# Altium PCB Main.PcbDoc
Units mm, origin at the board's own origin, x right, y up, seen from the top; angles counter-clockwise.
Board outline 198 x 54 mm, 2 copper layers (Top Layer, Bottom Layer), stack 1.671 mm thick; 70 components, 64 nets, 254 pads, 57 vias.
Unrouted connection lines stored in the file: 37.
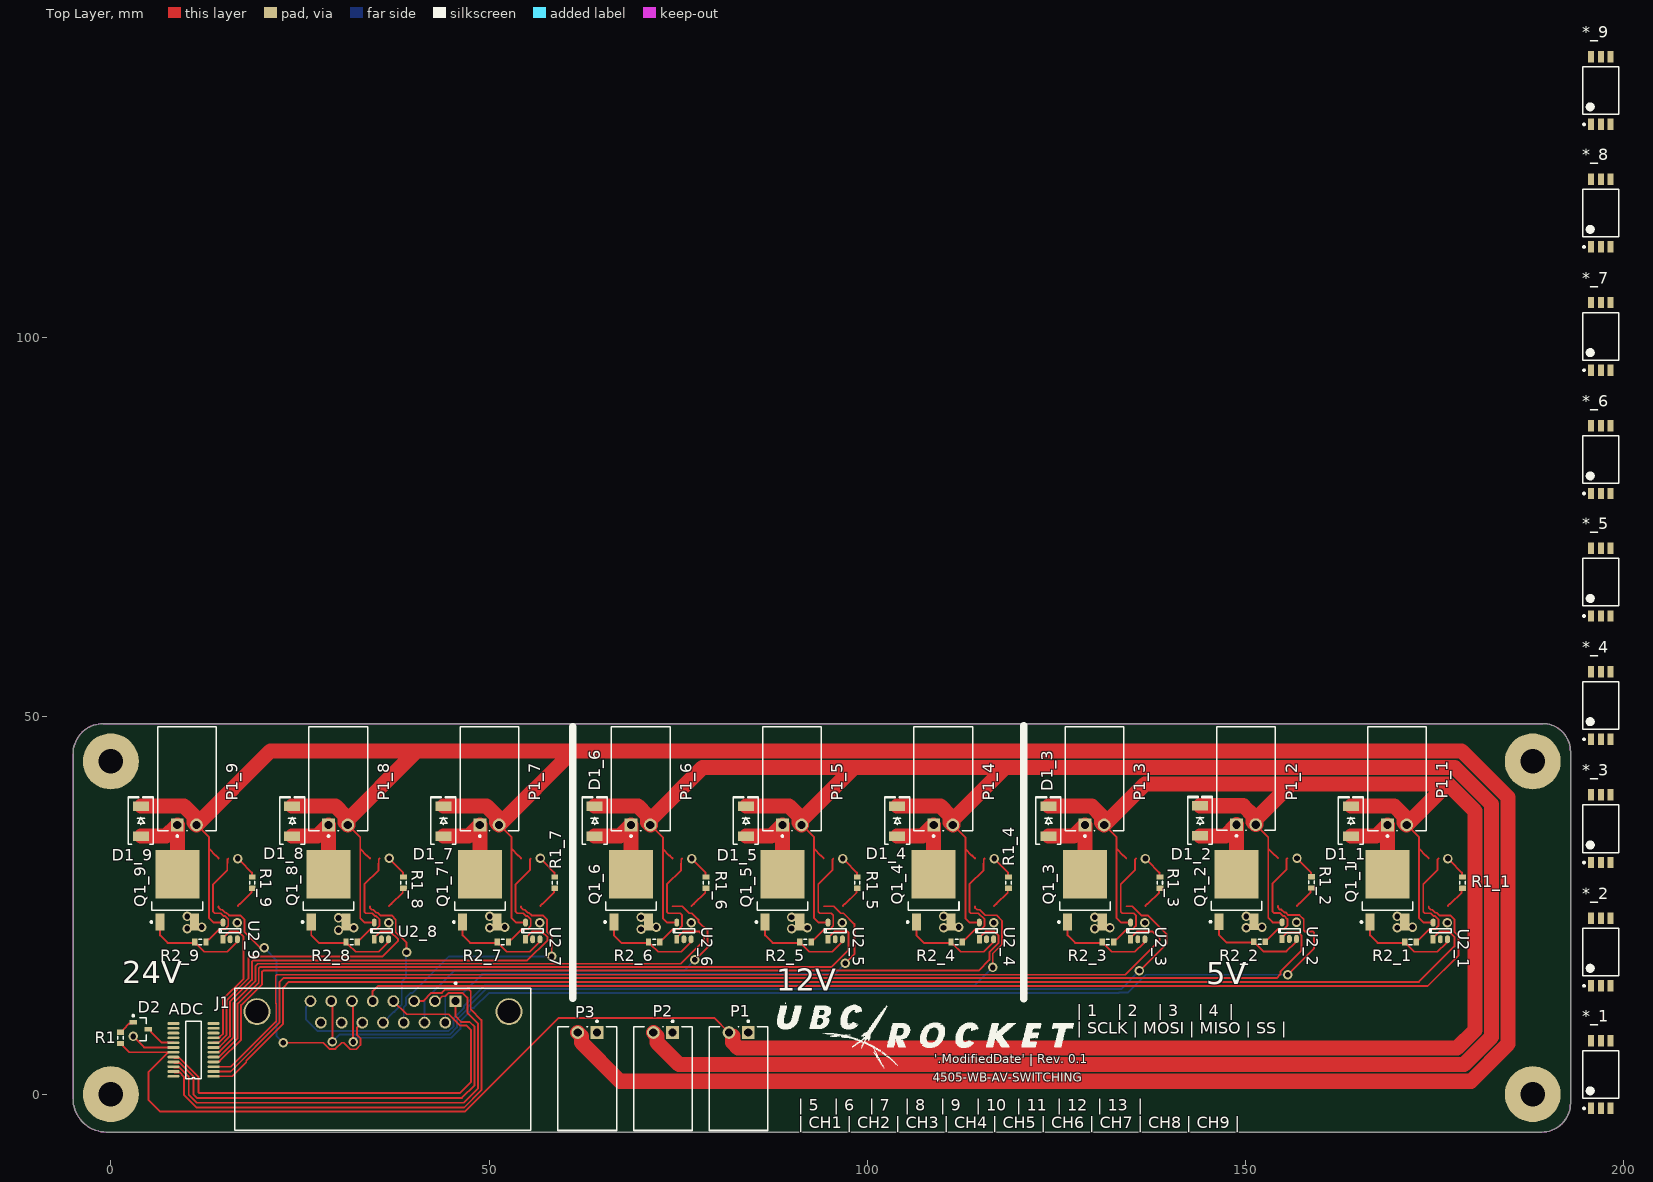
[diagram p0: Top Layer view]
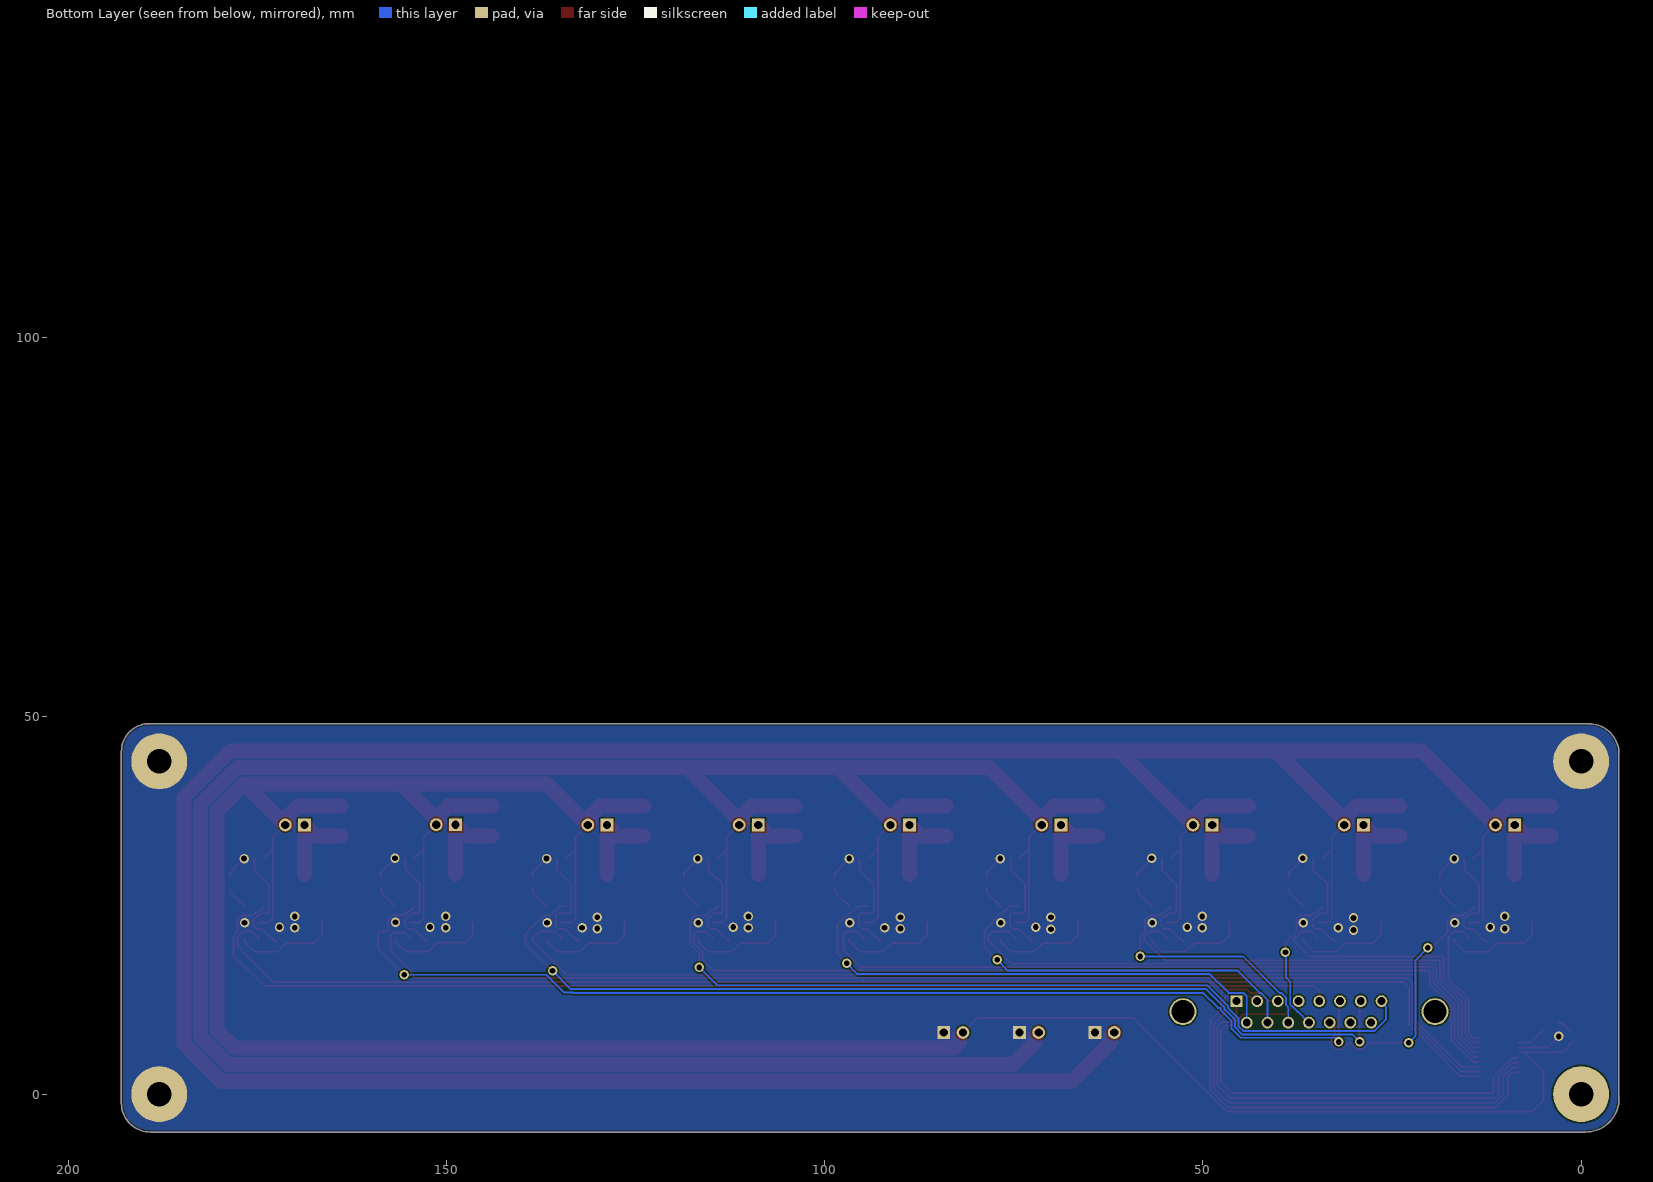
[diagram p1: Bottom Layer view, seen from below]

## Layer stack, top to bottom
Top Solder: solder mask 0.0102, Solder Resist, Dk 3.5
Top Layer: signal copper 0.0356
Dielectric 1: dielectric 1.6, FR-4, Dk 4.8
Bottom Layer: signal copper 0.0356
Bottom Solder: solder mask 0.0102, Solder Resist, Dk 3.5

## Board outline
-0.6,-5 189.2,-5 ccw(c189.2,-1.2) 193,-1.2 193,45.3 ccw(c189.3,45.3) 189.3,49 -1,49 ccw(c-1,45) -5,45 -5,-0.6 ccw(c-0.6,-0.6)

## Design rules (kind name [scope] priority, off if disabled: settings)
Clearance [All] p1: gap=0.152 ignorepadtopadclearanceinfootprint=FALSE except(0: Arc-Hole Track-Hole SMDPad-Hole THPad-Hole Via-Hole Fill-Hole Poly-Hole Region-Hole Text-Hole)
ComponentClearance [All] p1: gap=0 collisioncheckmode=3 verticalgap=0.003 showdistances=FALSE
HoleSize [All] p1: absolutevalues=TRUE maxlimit=25.4 minlimit=0.025 maxpercent=80.000 minpercent=20.000
MinimumSolderMaskSliver [All] p1: minsoldermaskwidth=0.025
PolygonConnect [All] p1: connectstyle=Direct reliefconductorwidth=0.254 reliefentries=4 polygonreliefangle="90 Angle" airgapwidth=0.254
RoomDefinition "SW 24-2" [InComponentClass('SW 24-2')] p1: confinementstyle=ConfineIn formatcopy=TRUE lockcomponents=FALSE outline 194.1,126.6 199.9,126.6 199.9,141.6 194.1,141.6
RoomDefinition "SW 24-1" [InComponentClass('SW 24-1')] p2: confinementstyle=ConfineIn formatcopy=TRUE lockcomponents=FALSE outline 194.1,110.4 199.9,110.4 199.9,125.4 194.1,125.4
RoomDefinition "SW 24-0" [InComponentClass('SW 24-0')] p3: confinementstyle=ConfineIn formatcopy=TRUE lockcomponents=FALSE outline 194.1,94.1 199.9,94.1 199.9,109.1 194.1,109.1
RoomDefinition "SW 12-1" [InComponentClass('SW 12-1')] p4: confinementstyle=ConfineIn formatcopy=TRUE lockcomponents=FALSE outline 194.1,61.6 199.9,61.6 199.9,76.6 194.1,76.6
RoomDefinition "SW 12-0" [InComponentClass('SW 12-0')] p5: confinementstyle=ConfineIn formatcopy=TRUE lockcomponents=FALSE outline 194.1,45.3 199.9,45.3 199.9,60.3 194.1,60.3
RoomDefinition "SW 5-2" [InComponentClass('SW 5-2')] p6: confinementstyle=ConfineIn formatcopy=TRUE lockcomponents=FALSE outline 194.1,29 199.9,29 199.9,44 194.1,44
RoomDefinition "SW 5-1" [InComponentClass('SW 5-1')] p7: confinementstyle=ConfineIn formatcopy=TRUE lockcomponents=FALSE outline 194.1,12.7 199.9,12.7 199.9,27.7 194.1,27.7
RoomDefinition "SW 5-0" [InComponentClass('SW 5-0')] p8: confinementstyle=ConfineIn formatcopy=TRUE lockcomponents=FALSE outline 194.1,-3.5 199.9,-3.5 199.9,11.5 194.1,11.5
RoomDefinition Main [InComponentClass('Main')] p9: confinementstyle=ConfineIn formatcopy=TRUE lockcomponents=FALSE outline -5,-5 45.8,-5 45.8,20.4 -5,20.4
RoomDefinition "SW 12-2" [InComponentClass('SW 12-2')] p10: confinementstyle=ConfineIn formatcopy=TRUE lockcomponents=FALSE outline 3.199,23.534 105.599,23.534 105.599,92.033 3.199,92.033
RoutingVias [All] p1: holewidth=0.2 width=0.505 viastyle="Through Hole" minholewidth=0.2 minwidth=0.505 maxholewidth=0.711 maxwidth=1.27
SilkToSilkClearance [All] p1: silktosilkclearance=0.025
SilkToSolderMaskClearance [IsPad] p1: minsilkscreentomaskgap=0.025 clearancetoexposedcopper=TRUE
SolderMaskExpansion [All] p1: expansion=0.102 istentingtop=FALSE
Width [All] p1: maxlimit=5.08 minlimit=0.25 preferedwidth=0.305
25 further rules are at their usual default settings.

## Classes and differential pairs
channel class "Cuurent Monitored Power Switch": "SW 5-0" "SW 5-1" "SW 5-2" "SW 12-0" "SW 12-1" "SW 12-2" "SW 24-0" "SW 24-1" "SW 24-2"
component class "SW 24-2": *_9 D1_9 P1_9 Q1_9 R1_9 R2_9 U2_9
component class "SW 24-1": *_8 D1_8 P1_8 Q1_8 R1_8 R2_8 U2_8
component class "SW 24-0": *_7 D1_7 P1_7 Q1_7 R1_7 R2_7 U2_7
component class "SW 12-2": *_6 D1_6 P1_6 Q1_6 R1_6 R2_6 U2_6
component class "SW 12-1": *_5 D1_5 P1_5 Q1_5 R1_5 R2_5 U2_5
component class "SW 12-0": *_4 D1_4 P1_4 Q1_4 R1_4 R2_4 U2_4
component class "SW 5-2": *_3 D1_3 P1_3 Q1_3 R1_3 R2_3 U2_3
component class "SW 5-1": *_2 D1_2 P1_2 Q1_2 R1_2 R2_2 U2_2
component class "SW 5-0": *_1 D1_1 P1_1 Q1_1 R1_1 R2_1 U2_1
component class Main: ADC D2 J1 P1 P2 P3 R1

## Components (designator, comment, footprint, x,y, rotation, side; value= is the part's Value field where it differs from the comment)
*_1 "FOD8480" SOIC127P1030X348-6N 197,2.6 r90 top (schematic designator *)
*_2 "FOD8480" SOIC127P1030X348-6N 197,18.8 r90 top (schematic designator *)
*_3 "FOD8480" SOIC127P1030X348-6N 197,35.1 r90 top (schematic designator *)
*_4 "FOD8480" SOIC127P1030X348-6N 197,51.4 r90 top (schematic designator *)
*_5 "FOD8480" SOIC127P1030X348-6N 197,67.7 r90 top (schematic designator *)
*_6 "FOD8480" SOIC127P1030X348-6N 197,83.9 r90 top (schematic designator *)
*_7 "FOD8480" SOIC127P1030X348-6N 197,100.2 r90 top (schematic designator *)
*_8 "FOD8480" SOIC127P1030X348-6N 197,116.5 r90 top (schematic designator *)
*_9 "FOD8480" SOIC127P1030X348-6N 197,132.7 r90 top (schematic designator *)
ADC "MAX11642EEG+" QSOP-24 13.581,2.366 r180 top
D1_1 "GS1GE" "DO214AC SMA" 163.964,36.109 r90 top (schematic designator D1)
D1_2 "GS1GE" "DO214AC SMA" 144.005,36.147 r90 top (schematic designator D1)
D1_3 "GS1GE" "DO214AC SMA" 123.964,36.109 r90 top (schematic designator D1)
D1_4 "GS1GE" "DO214AC SMA" 103.964,36.109 r90 top (schematic designator D1)
D1_5 "GS1GE" "DO214AC SMA" 83.964,36.109 r90 top (schematic designator D1)
D1_6 "GS1GE" "DO214AC SMA" 63.964,36.109 r90 top (schematic designator D1)
D1_7 "GS1GE" "DO214AC SMA" 43.964,36.109 r90 top (schematic designator D1)
D1_8 "GS1GE" "DO214AC SMA" 23.964,36.109 r90 top (schematic designator D1)
D1_9 "GS1GE" "DO214AC SMA" 3.964,36.109 r90 top (schematic designator D1)
D2 "LM4040AIM3-2.0/NOPB" MF03A_L 3.953,8.589 r0 top
J1 "5745782-4" TECO-5745782-4_V 35.98,10.885 r0 top
P1 "70553-0001" Molex_70553-0001_MFG 83,2.06 r0 top
P1_1 "70553-0001" Molex_70553-0001_MFG 170.06,41.697 r180 top (schematic designator P1)
P1_2 "70553-0001" Molex_70553-0001_MFG 150.101,41.735 r180 top (schematic designator P1)
P1_3 "70553-0001" Molex_70553-0001_MFG 130.06,41.697 r180 top (schematic designator P1)
P1_4 "70553-0001" Molex_70553-0001_MFG 110.06,41.697 r180 top (schematic designator P1)
P1_5 "70553-0001" Molex_70553-0001_MFG 90.06,41.697 r180 top (schematic designator P1)
P1_6 "70553-0001" Molex_70553-0001_MFG 70.06,41.697 r180 top (schematic designator P1)
P1_7 "70553-0001" Molex_70553-0001_MFG 50.06,41.697 r180 top (schematic designator P1)
P1_8 "70553-0001" Molex_70553-0001_MFG 30.06,41.697 r180 top (schematic designator P1)
P1_9 "70553-0001" Molex_70553-0001_MFG 10.06,41.697 r180 top (schematic designator P1)
P2 "70553-0001" Molex_70553-0001_MFG 73,2.06 r0 top
P3 "70553-0001" Molex_70553-0001_MFG 63,2.06 r0 top
Q1_1 "IKD03N60RF" INF-PG-TO252-3-21_V 168.79,26.965 r90 top (schematic designator Q1)
Q1_2 "IKD03N60RF" INF-PG-TO252-3-21_V 148.831,27.003 r90 top (schematic designator Q1)
Q1_3 "IKD03N60RF" INF-PG-TO252-3-21_V 128.79,26.965 r90 top (schematic designator Q1)
Q1_4 "IKD03N60RF" INF-PG-TO252-3-21_V 108.79,26.965 r90 top (schematic designator Q1)
Q1_5 "IKD03N60RF" INF-PG-TO252-3-21_V 88.79,26.965 r90 top (schematic designator Q1)
Q1_6 "IKD03N60RF" INF-PG-TO252-3-21_V 68.79,26.965 r90 top (schematic designator Q1)
Q1_7 "IKD03N60RF" INF-PG-TO252-3-21_V 48.79,26.965 r90 top (schematic designator Q1)
Q1_8 "IKD03N60RF" INF-PG-TO252-3-21_V 28.79,26.965 r90 top (schematic designator Q1)
Q1_9 "IKD03N60RF" INF-PG-TO252-3-21_V 8.79,26.965 r90 top (schematic designator Q1)
R1 "0603" J1-0603 1.286,7.446 r270 top value=30K
R1_1 "0603" J1-0603 178.696,27.981 r270 top value=150 (schematic designator R1)
R1_2 "0603" J1-0603 158.737,28.019 r270 top value=150 (schematic designator R1)
R1_3 "0603" J1-0603 138.696,27.981 r270 top value=150 (schematic designator R1)
R1_4 "0603" J1-0603 118.696,27.981 r270 top value=150 (schematic designator R1)
R1_5 "0603" J1-0603 98.696,27.981 r270 top value=150 (schematic designator R1)
R1_6 "0603" J1-0603 78.696,27.981 r270 top value=150 (schematic designator R1)
R1_7 "0603" J1-0603 58.696,27.981 r270 top value=150 (schematic designator R1)
R1_8 "0603" J1-0603 38.696,27.981 r270 top value=150 (schematic designator R1)
R1_9 "0603" J1-0603 18.696,27.981 r270 top value=150 (schematic designator R1)
R2_1 "0603" J1-0603 171.838,20.107 r0 top value=10 (schematic designator R2)
R2_2 "0603" J1-0603 151.879,20.145 r0 top value=10 (schematic designator R2)
R2_3 "0603" J1-0603 131.838,20.107 r0 top value=10 (schematic designator R2)
R2_4 "0603" J1-0603 111.838,20.107 r0 top value=10 (schematic designator R2)
R2_5 "0603" J1-0603 91.838,20.107 r0 top value=10 (schematic designator R2)
R2_6 "0603" J1-0603 71.838,20.107 r0 top value=10 (schematic designator R2)
R2_7 "0603" J1-0603 51.838,20.107 r0 top value=10 (schematic designator R2)
R2_8 "0603" J1-0603 31.838,20.107 r0 top value=10 (schematic designator R2)
R2_9 "0603" J1-0603 11.838,20.107 r0 top value=10 (schematic designator R2)
U2_1 "IR25750" SOT23-5 174.825,20.488 r90 top (schematic designator U2)
U2_2 "IR25750" SOT23-5 154.866,20.526 r90 top (schematic designator U2)
U2_3 "IR25750" SOT23-5 134.825,20.488 r90 top (schematic designator U2)
U2_4 "IR25750" SOT23-5 114.825,20.488 r90 top (schematic designator U2)
U2_5 "IR25750" SOT23-5 94.825,20.488 r90 top (schematic designator U2)
U2_6 "IR25750" SOT23-5 74.825,20.488 r90 top (schematic designator U2)
U2_7 "IR25750" SOT23-5 54.825,20.488 r90 top (schematic designator U2)
U2_8 "IR25750" SOT23-5 34.825,20.488 r90 top (schematic designator U2)
U2_9 "IR25750" SOT23-5 14.825,20.488 r90 top (schematic designator U2)

## Footprints (in the part's own frame and the unit in brackets; to place one, negate y for a bottom-side part, rotate by r counter-clockwise, add the part's x,y. Pads: shape width x height; smd on the part's side, far side on the other; paste and mask are expansions set on the pad)
"DO214AC SMA" [mm] "Molded Diode, 2-Leads, Body 4.30x2.60mm, IPC Medium Density"
  rect 1.27x2.1 smd: 1(-1.985,0) 2(1.985,0)
  silkscreen extent -3.08,-1.65 3.25,1.65, body extent -2.6,-1.37 2.6,1.37, height 2.4
INF-PG-TO252-3-21_V [mm] "DPAK, 3-Leads, Body 6.6x6.1mm, Pitch 2.29mm, Recommended"
  rect 2.2x1.2 smd: 1(-4.2,2.29) 3(-4.2,-2.29)
  rect 6.4x5.8 smd: 2(2.1,0)
  silkscreen extent -4.32,-3.35 -1.5,3.56, body extent -2.65,-3.37 3.58,3.37, height 2.39
J1-0603 [mm] "Chip Resistor, Body 1.6x0.8mm, IPC High Density"
  rect 0.7x0.9 smd: 1(-0.75,0) 2(0.75,0)
  silkscreen extent -0.2,-0.35 0.2,0.35, body extent -0.85,-0.48 0.85,0.48, height 0.9
MF03A_L [mm] "SOT23, 3-Leads, Body 2.9x1.3mm, Pitch 0.95mm, Lead Span 2.4mm, IPC High Density"
  rect 1x0.6 smd: 1(-1,0.95) 2(-1,-0.95) 3(1,0)
  silkscreen extent -1.12,-1.5 0.7,1.92, body extent -0.7,-1.52 0.7,1.52, height 1.12
Molex_70553-0001_MFG [mm]
  rect 1.69x1.69 hole 1.09 paste-1000 mask+0: 1(1.27,6.095)
  round 1.69 hole 1.09 paste-1000 mask+0: 2(-1.27,6.095)
  silkscreen extent -3.88,-6.86 3.88,7.7, body extent -3.98,-6.96 3.98,7.04, height 0.25
QSOP-24 [mm]
  rect 1.6x0.36 smd: 1(0,0)
  oval 1.6x0.36 smd: 2(0,-0.635) 3(0,-1.27) 4(0,-1.905) 5(0,-2.54) 6(0,-3.175) 7(0,-3.81) 8(0,-4.445) 9(0,-5.08) 10(0,-5.715) 11(0,-6.35) 12(0,-6.985) 13(5.31,-6.985) 14(5.31,-6.35) 15(5.31,-5.715) 16(5.31,-5.08) 17(5.31,-4.445) 18(5.31,-3.81) 19(5.31,-3.175) 20(5.31,-2.54) 21(5.31,-1.905) 22(5.31,-1.27) 23(5.31,-0.635) 24(5.31,0)
  silkscreen extent 1.63,-7.3 3.68,0.32
SOIC127P1030X348-6N [mm] "SOIC, 6-Leads, Body 4.50x6.80mm, Pitch 1.27mm, IPC Medium Density"
  rect 1.5x0.8 smd: 1(-4.475,1.27) 2(-4.475,0) 3(-4.475,-1.27) 4(4.475,-1.27) 5(4.475,0) 6(4.475,1.27)
  silkscreen extent -4.6,-2.4 3.15,2.4, body extent -3.55,-2.4 3.55,2.4, height 3.48
SOT23-5 [mm]
  rect 1.06x0.65 smd: 1(0,0)
  oval 1.06x0.65 smd: 2(0,-0.95) 3(0,-1.9) 4(2.2,-1.9) 5(2.2,0)
  silkscreen extent 0.83,-2.37 1.36,0.48
TECO-5745782-4_V [mm] "THD, 15-Leads, Body 39.14x18.8mm, Pitch 2.74mm"
  rect 1.55x1.55 hole 1.04: 1(9.6,1.42)
  round 1.55 hole 1.04: 2(6.86,1.42) 3(4.12,1.42) 4(1.38,1.42) 5(-1.36,1.42) 6(-4.1,1.42) 7(-6.84,1.42) 8(-9.58,1.42) 9(8.23,-1.42) 10(5.49,-1.42) 11(2.75,-1.42) 12(0.01,-1.42) 13(-2.73,-1.42) 14(-5.47,-1.42) 15(-8.21,-1.42)
  round 3.55 hole 3.05: MH1(16.66,0.028) MH2(-16.66,0.028)
  silkscreen extent -19.57,-15.67 19.57,3.91, body extent -19.68,-15.74 19.69,3.2, height 12.55

## Part data
ADC: "ADC Single SAR 300ksps 8-bit Serial 24-Pin QSOP", Case/Package=QSOP, Manufacturer=Maxim, Max Operating Temperature=85°C, Max Power Dissipation=762mW, Min Operating Temperature=-40°C, Operating Supply Voltage=5.25V, Package Quantity=1, Supplier Part Number 1=MAX11642EEG+-ND, Category="Analog to Digital Converters (ADCs)", ComponentLink1Description=https://datasheet.ciiva.com/1275/max11638-max11643-1275940.pdf?src-supplier=Digi-Key, ComponentLink1URL=https://datasheet.ciiva.com/1275/max11638-max11643-1275940.pdf?src-supplier=Digi-Key, ComponentLink2Description=https://datasheet.ciiva.com/14260/max11638-max11643-14260779.pdf?src-supplier=Avnet, ComponentLink2URL=https://datasheet.ciiva.com/14260/max11638-max11643-14260779.pdf?src-supplier=Avnet, ComponentLink3Description=https://datasheet.ciiva.com/16611/max11638-max11643-16611753.pdf?src-supplier=Avnet+Europe, ComponentLink3URL=https://datasheet.ciiva.com/16611/max11638-max11643-16611753.pdf?src-supplier=Avnet+Europe, Conversion Rate=300KS/s, Interface=SPI,Serial, Manufacturer Part Number=MAX11642EEG+, Mount="Surface Mount", Number of A/D Converters=1, Number of Analog Inputs=16, Number of Bits=8, Number of Converters=1, Number of Pins=24, Packaging=Rail/Tube, Polarity=Unipolar, Pricing 1="1=4.05000, 10=3.64100, 25=3.44200, 100=2.83000, 250=2.53940, 500=2.53200 (USD)", Radiation Hardening=No, Resolution=8b, RoHS=Yes, Sampling Rate=300000S/s, Signal to Noise Ratio (SNR)=49dB, Stock 1=132, Supplier 1=Digi-Key, Supply Type=Single
D1_1 D1_2 D1_3 D1_4 D1_5 D1_6 D1_7 D1_8 D1_9: "Diode Switching 400V 1A 2-Pin SMAE T/R", Average Rectified Current=1A, Manufacturer=MCC, Manufacturer Part Number=GS1GE-TP, Max Reverse Voltage (DC)=400V, Supplier Part Number 1=GS1GE-TPMSCT-ND, Category="Rectifier Diodes", ComponentLink1Description=https://media.digikey.com/pdf/Data%20Sheets/Micro%20Commercial%20PDFs/GS1AE-GS1ME(SMAE)_Rev.F_Oct19_2015_DS.pdf?src-supplier=Digi-Key, ComponentLink1URL=https://media.digikey.com/pdf/Data%20Sheets/Micro%20Commercial%20PDFs/GS1AE-GS1ME(SMAE)_Rev.F_Oct19_2015_DS.pdf?src-supplier=Digi-Key, ComponentLink2Description=http://components.arrow.com/part/dataview/43471173S9417573N2022?src-supplier=Arrow, ComponentLink2URL=http://components.arrow.com/part/dataview/43471173S9417573N2022?src-supplier=Arrow, ComponentLink3Description=http://www.mccsemi.com/up_pdf/GS1AE-GS1ME(SMAE).pdf?src-supplier=Digi-Key, ComponentLink3URL=http://www.mccsemi.com/up_pdf/GS1AE-GS1ME(SMAE).pdf?src-supplier=Digi-Key, Lead Free="Lead Free", Mount="Surface Mount", Number of Pins=2, Packaging="Tape and Reel", Pricing 1="1=0.27000, 10=0.22100, 25=0.18560, 100=0.09060, 250=0.08920, 500=0.07560, 1000=0.05253, 2500=0.04882 (USD)", RoHS=Yes, Stock 1=2437, Supplier 1=Digi-Key
D2: library part CMP-0074-00630-2, "Precision Micropower Shunt Voltage Reference, 3-pin SOT-23, Pb-Free", Case/Package=SC, Cathode Current=70uA, Manufacturer="National Semiconductor", Manufacturer Part Number=LM4040EIM7-2.0/NOPB, Max Operating Temperature=85°C, Max Output Current=15mA, Max Output Voltage=2.048V, Min Operating Temperature=-40°C, Package Quantity=1000, PackageTopMarking=RJA*XTT, PowerWise=N, Temperature Coefficient=150ppm/°C, Tolerance=2%, Category="Voltage References", ComponentLink1Description="LM4040 Datasheet", ComponentLink1URL=http://www.national.com/ds/LM/LM4040.pdf, ComponentLink2Description="LM4040 Web Page", ComponentLink2URL=http://www.national.com/pf/LM/LM4040.html, ComponentLink3Description="MF03A Package Page", ComponentLink3URL=http://www.national.com/packaging/folders/mf03a.html, ComponentLink4Description=https://datasheet.ciiva.com/6593/lm4040-n-6593128.pdf?src-supplier=Digi-Key, ComponentLink4URL=https://datasheet.ciiva.com/6593/lm4040-n-6593128.pdf?src-supplier=Digi-Key, ComponentLink5Description=https://datasheet.ciiva.com/26067/lm4040-n-26067450.pdf?src-supplier=Avnet+Europe, ComponentLink5URL=https://datasheet.ciiva.com/26067/lm4040-n-26067450.pdf?src-supplier=Avnet+Europe, ComponentLink6Description=https://datasheet.ciiva.com/14198/lm4040-n-q1-14198445.pdf?src-supplier=Avnet, ComponentLink6URL=https://datasheet.ciiva.com/14198/lm4040-n-q1-14198445.pdf?src-supplier=Avnet, CompType="Voltage Reference IC", DatasheetVersion=Apr-2005, Lead Free="Lead Free", Mount="Surface Mount", Number of Channels=1, Number of Pins=5, Output Current=15mA, Output Voltage=2.048V, PackageDescription="Molded SOT-23, .115 x .051 x .037in Body, 3 Lead, .075 in Pitch", PackageReference=MF03A, PackageVersion="revB, Mar-2003", Packaging="Tape and Reel", PinCount=3, Pricing 1="1=0.44000, 10=0.37500, 25=0.34960, 100=0.25980, 250=0.21980, 500=0.20982 (USD)", Radiation Hardening=No, Reference Type=Shunt, RevisionNote="Component URLs added", RoHS=Y, Stock 1=2945, Supplier 1=Digi-Key
J1: library part CMP-2000-05646-1, "Female D-Sub Connector, Pitch 2.74 mm, 2 Row, 15 Position, Height 12.93 mm, Tail Length 3.18 mm, -55 to 105 degC, RoHS, Tray", Color=Black, Current Rating=6A, Manufacturer="TE Connectivity", Operating Temperature=-55°C~105°C, Package Description="Female D-Sub Connector, Pitch 2.74 mm, 2 Row, 15 Position, Height 12.93 mm, Tail Length 3.18 mm", Standard Package=104, Voltage Rating=125V, 3D Model=5745782-4.pdf, Catalog Drawings=AMPD-SubMale.318, Category=Connectors,Interconnects, Connector Style=D-Sub, Connector Type=Receptacle,FemaleSockets, Contact Finish=Gold, Contact Finish Thickness=30µin(0.76µm), Contact Type=Signal, Datasheet URL=http://www.te.com/commerce/DocumentDelivery/DDEController?Action=srchrtrv&DocNm=5745782&DocType=Customer+Drawing&DocLang=English, Datasheet Version="Rev. R, 08/2011", Dynamic Catalog=AMPLIMITEHD-20Series, Family=D-SubConnectors, Featured Product=AMPLIMITED-SubminiatureConnectors, Features=GroundStrap, Flange Feature=Housing/Shell(4-40), Housing Material=Thermoplastic, Manufacturer URL=http://www.te.com/, Mating Products="1-745494-8-ND / -CONNPLUG15POS26-22AWGGOLD/FL / A34118-ND / -CONND-SUBPLUG15P22-26AWGAU / A32503-ND / -CONNDSUBPLUG15POSSLDCUP / AMR15B-ND / -CONND-SUBPLUG15POSGOLD / AML15B-ND / -CONND-SUBPLUG15POSGOLD / A31968-ND / -CONND-SUBPLUG15P22-26AWGAU / A31967-ND / -CONND-SUBPLUG15P26-30AWGAU", Mounting Technology=ThroughHole, Mounting Type=ThroughHole,RightAngle, Number of Positions=15, Number of Rows=2, Other Names=A32076, Package Reference=5745782-4, Product Training Modules=AMPLIMITED-SubConnectors, RoHS Information=5745782-4StatementofCompliance, Series=AMPLIMITEHD-20, Shell Material, Finish=Steel,TinPlated, Shell Size, Connector Layout=2(DA,A), Termination=Solder
P1 P2 P3: "Molex Connector 2 pin 90 degree through hole .100"
P1_1 P1_2 P1_3 P1_4 P1_5 P1_6 P1_7 P1_8 P1_9: "24V power in"
Q1_1 Q1_2 Q1_3 Q1_4 Q1_5 Q1_6 Q1_7 Q1_8 Q1_9: library part CMP-1166-00103-1, "600 V TrenchStop RC-Series for Hard Switching Applications up to 30 KHz, 5 A IC, -40 to 175 degC, PG-TO252-3-21, Reel, Green", Manufacturer=Infineon, Switching Frequency="RC Drives Fast Series 4 - 30 kHz", ComponentLink1Description="Manufacturer URL", ComponentLink1URL=http://www.infineon.com/, ComponentLink2Description=Datasheet, ComponentLink2URL=http://www.infineon.com/dgdl/IKD03N60RF+Rev+2.2.pdf?folderId=db3a3043156fd5730115f56849b61941&fileId=db3a30433c5c92fb013c5d3978350068, ComponentLink3Description="Package Specification", ComponentLink3URL=http://www.infineon.com/cms/packages/SMD_-_Surface_Mounted_Devices/P-PG-TO252/P-PG-TO252-03-021.html?__locale=en, DatasheetVersion="Rev. 2.2", Eoff(typ)="0.04Â mJ", Eon(typ)="0.05Â mJ", Green=TRUE, Halogen-free=TRUE, IC(max)@ 25degrees="5Â A", IC(max)@ 100degrees="2.5Â A", ICpuls(max)="7.5Â A", IF (max)="5Â A", IFpuls(max)="7.5Â A", Irrm(typ)="3.8 A", Mounting Technology="Surface Mount", PackageDescription="3-Pin Plastic (Green) Transistor Single Outline Package, Body 6.1 x 6.6 mm, Pitch 2.29 mm", PackageReference=PG-TO252-3-21, Packing=Reel, PartNumber=IKD03N60RF, Product Type=IKD03N60RF, Ptot(max)="53.6 W", QGate (typ)="17.1Â nC", Qrr(typ)="0.06Â uC", td(off) (typ)="128 ns", td(on)(typ)="10 ns", tf(typ)="93 ns", tr(typ)="8 ns", VCE(max)="600Â V", VCE(sat)(typ)="2.2Â V", VF (typ)="2.1Â V"
R1 R1_1 R1_2 R1_3 R1_4 R1_5 R1_6 R1_7 R1_8 R1_9 R2_1 R2_2 R2_3 R2_4 R2_5 R2_6 R2_7 R2_8 R2_9: library part Res3, "Resistor", LatestRevisionDate=29-May-2009, LatestRevisionNote="IPC-7351 Footprint Added.", PackageDescription="Chip Resistor", PackageReference=J1-0603, Published=8-Jun-2000, Publisher="Altium Limited"
U2_1 U2_2 U2_3 U2_4 U2_5 U2_6 U2_7 U2_8 U2_9: "1.8V/2.5V/3.3V/5V/9V/12V/15V/18V/24V 5-Pin SOT-23 T/R", Case/Package=SOT-23-5, Manufacturer="International Rectifier", Manufacturer Part Number=IR25750LTRPBF, Max Operating Temperature=125°C, Max Supply Current=50uA, Max Supply Voltage=600V, Min Operating Temperature=-40°C, Min Supply Voltage=-3V, Package Quantity=1, Supplier Part Number 1=IR25750LTRPBFCT-ND, Category="Power Management ICs", ComponentLink1Description=https://datasheet.ciiva.com/29590/ir25750lpbf-preliminary-29590193.pdf?src-supplier=Digi-Key, ComponentLink1URL=https://datasheet.ciiva.com/29590/ir25750lpbf-preliminary-29590193.pdf?src-supplier=Digi-Key, Height=1.3mm, Lead Free="Lead Free", Length=3mm, Mount="Surface Mount", Number of Pins=5, Operating Supply Current=50uA, Packaging="Tape and Reel", Pricing 1="1=0.79000, 10=0.69900, 25=0.65680, 100=0.49790, 250=0.42376, 500=0.40256, 1000=0.30721 (USD)", RoHS=Yes, Stock 1=2771, Supplier 1=Digi-Key, Weight=0.001058oz, Width=1.75mm

## Free pads (board coordinates)
  round 7.4 hole 3.251: 1(0,0) 1(0,44) 1(188,0) 1(188,44)

## Via types
v1: diameter 1.25, hole 0.75, Top Layer to Bottom Layer, 57 vias

## Nets (pads, with @x,y where several pads share a name; then routed paths per layer and width w, separated by ;. In a path a pad name is that pad's centre, name@x,y a point inside that pad or via, vN(x,y) a via of type N, cw(c..) or ccw(c..) an arc to the next point about the centre after c; other vN are vias at no path point)
+5: *_1.6 *_2.6 *_3.6 ADC.19 D1_1.2 D1_2.2 D1_3.2 P1.2 P1_1.2 P1_2.2 P1_3.2 R1.2 U2_1.5 U2_2.5 U2_3.5 | length 373.1
  Top Layer w0.25: R1.2 1.386,6.696 1.611,6.471 1.611,6.371 2.441,5.541 ADC.19@7.621,5.541 ; ADC.19 ADC.19@7.621,5.541 ; P1.2@82.225,7.66 P1.2 79.785,10.1 59.2,10.1 46.8,-2.3 6.5,-2.3 5,-0.8 5,2.969 7.442,5.411 7.491,5.411 ADC.19@7.621,5.541 ; P1_3.2 132.981,33.951 132.981,32.426 ; 134.251,31.156 134.251,31.207 133.904,31.554 133.853,31.554 132.981,32.426 ; U2_3.5 133.575,22.688 132.981,23.282 132.981,32.426 ; P1_2.2 153.022,33.989 153.022,32.464 ; 154.292,31.194 154.292,31.245 153.945,31.592 153.894,31.592 153.022,32.464 ; U2_2.5 153.616,22.726 153.022,23.32 153.022,32.464 ; P1_1.2 172.981,33.951 172.981,32.426 ; 174.251,31.156 174.251,31.207 173.904,31.554 173.853,31.554 172.981,32.426 ; U2_1.5 173.575,22.688 172.981,23.282 172.981,32.426
  Top Layer w2: P1.2@82.225,7.66 82.225,6.813 82.928,6.11 178,6.11 180.346,8.456 180.346,37.431 176.777,41 156.051,41 ; D1_3.2 129.685,38.094 130.99,36.789 130.99,35.942 P1_3.2 136.728,41 156.051,41 ; D1_2.2 149.726,38.132 151.031,36.827 P1_2.2@151.031,35.98 ; P1_2.2 P1_2.2@151.031,35.98 ; D1_1.2 169.685,38.094 170.99,36.789 170.99,35.942 P1_1.2 176.728,41 ; P1_2.2@151.031,35.98 156.051,41
+12: *_4.6 *_5.6 *_6.6 D1_4.2 D1_5.2 D1_6.2 P1_4.2 P1_5.2 P1_6.2 P2.2 U2_4.5 U2_5.5 U2_6.5 | length 359.9
  Top Layer w0.25: P1_6.2 72.981,33.951 72.981,32.426 ; 74.251,31.156 74.251,31.207 73.904,31.554 73.853,31.554 72.981,32.426 ; U2_6.5 73.575,22.688 72.981,23.282 72.981,32.426 ; P1_5.2 92.981,33.951 92.981,32.426 ; 94.251,31.156 94.251,31.207 93.904,31.554 93.853,31.554 92.981,32.426 ; U2_5.5 93.575,22.688 92.981,23.282 92.981,32.426 ; P1_4.2 112.981,33.951 112.981,32.426 ; 114.251,31.156 114.251,31.207 113.904,31.554 113.853,31.554 112.981,32.426 ; U2_4.5 113.575,22.688 112.981,23.282 112.981,32.426
  Top Layer w2: D1_6.2 69.685,38.094 70.99,36.789 P1_6.2@70.99,35.942 ; P1_6.2 P1_6.2@70.99,35.942 ; P2.2 72.225,7.66 72.225,6.813 75.128,3.91 178.911,3.91 182.546,7.545 182.546,38.343 177.689,43.2 118.248,43.2 ; D1_5.2 89.685,38.094 90.99,36.789 P1_5.2@90.99,35.942 ; P1_5.2 P1_5.2@90.99,35.942 ; D1_4.2 109.685,38.094 110.99,36.789 P1_4.2@110.99,35.942 ; P1_4.2 P1_4.2@110.99,35.942 ; P1_6.2@70.99,35.942 78.248,43.2 98.248,43.2 ; P1_5.2@90.99,35.942 98.248,43.2 ; 98.248,43.2 118.248,43.2 ; P1_4.2@110.99,35.942 118.248,43.2
+24: *_7.6 *_8.6 *_9.6 D1_7.2 D1_8.2 D1_9.2 P1_7.2 P1_8.2 P1_9.2 P3.2 U2_7.5 U2_8.5 U2_9.5 | length 445.4
  Top Layer w0.25: P1_9.2 12.981,33.951 12.981,32.426 ; 14.251,31.156 14.251,31.207 13.904,31.554 13.853,31.554 12.981,32.426 ; U2_9.5 13.575,22.688 12.981,23.282 12.981,32.426 ; P1_8.2 32.981,33.951 32.981,32.426 ; 34.251,31.156 34.251,31.207 33.904,31.554 33.853,31.554 32.981,32.426 ; U2_8.5 33.575,22.688 32.981,23.282 32.981,32.426 ; P1_7.2 52.981,33.951 52.981,32.426 ; 54.251,31.156 54.251,31.207 53.904,31.554 53.853,31.554 52.981,32.426 ; U2_7.5 53.575,22.688 52.981,23.282 52.981,32.426
  Top Layer w2: D1_9.2 9.685,38.094 10.99,36.789 10.99,35.942 P1_9.2 21.128,45.4 40.1,45.4 ; D1_8.2 29.685,38.094 30.99,36.789 P1_8.2@30.99,35.942 ; P1_8.2 P1_8.2@30.99,35.942 ; D1_7.2 49.685,38.094 50.99,36.789 50.99,35.942 P1_7.2 61.128,45.4 ; P3.2 62.225,7.66 62.225,6.813 67.328,1.71 179.823,1.71 184.746,6.633 184.746,39.254 178.6,45.4 61.128,45.4 ; P1_8.2@30.99,35.942 40.1,45.052 40.1,45.4 ; 40.1,45.4 61.128,45.4
AIN0: ADC.1 U2_1.1 | length 179
  Top Layer w0.25: ADC.1 16.066,2.366 17.9,4.2 17.9,4.427 22.77,9.297 22.77,14.07 23.54,14.84 172.94,14.84 177.646,19.546 177.646,20.824 176.967,21.504 175.648,21.504 175.037,20.893 175.025,20.893 174.825,20.693 U2_1.1
AIN1: ADC.2 U2_2.1 | length 159
  Top Layer w0.25: ADC.2 15.837,3.001 22.32,9.484 22.32,14.87 22.8,15.35 154.15,15.35 154.64,15.84 154.64,16.198 157.416,18.974 157.416,21 157.035,21.381 155.516,21.381 154.866,20.731 U2_2.1
AIN2: ADC.3 U2_3.1 | length 140.6
  Top Layer w0.25: ADC.3 15.836,3.636 21.87,9.67 21.87,11.969 21.8,12.039 21.8,15.654 21.946,15.8 134.1,15.8 138.678,20.378 138.678,20.585 137.76,21.504 135.648,21.504 135.037,20.893 135.025,20.893 134.825,20.693 U2_3.1
AIN3: ADC.4 U2_4.1 | length 118.8
  Top Layer w0.25: ADC.4 14.231,4.271 14.361,4.401 14.417,4.401 17.22,7.204 17.22,11.783 20,14.563 20,16.204 20.146,16.35 114.75,16.35 116.15,17.75 116.15,18.789 117.375,20.014 117.375,20.962 116.833,21.504 115.648,21.504 115.037,20.893 115.025,20.893 114.825,20.693 U2_4.1
AIN4: ADC.5 U2_5.1 | length 99.2
  Top Layer w0.25: ADC.5 14.231,4.906 14.361,5.036 14.416,5.036 16.77,7.39 16.77,11.969 19.55,14.749 19.55,16.65 19.7,16.8 95.242,16.8 97.539,19.097 97.539,21.358 97.393,21.504 95.648,21.504 95.037,20.893 95.025,20.893 94.825,20.693 U2_5.1
AIN5: ADC.6 U2_6.1 | length 79.8
  Top Layer w0.25: ADC.6 14.231,5.541 14.361,5.671 14.414,5.671 16.2,7.457 16.2,12.036 19.1,14.936 19.1,16.904 19.446,17.25 75.35,17.25 78.45,20.35 78.45,20.861 77.807,21.504 75.648,21.504 75.037,20.893 75.025,20.893 74.825,20.693 U2_6.1
AIN6: ADC.7 U2_7.1 | length 58.3
  Top Layer w0.25: ADC.7 14.231,6.176 14.361,6.306 14.413,6.306 15.75,7.643 15.75,12.222 18.65,15.122 18.65,17.504 18.846,17.7 55.061,17.7 57.746,20.385 57.746,20.724 56.967,21.504 55.648,21.504 55.037,20.893 55.025,20.893 54.825,20.693 U2_7.1
AIN7: ADC.8 U2_8.1 | length 38.6
  Top Layer w0.25: ADC.8 14.231,6.811 14.361,6.941 14.412,6.941 15.3,7.829 15.3,12.409 18.2,15.309 18.2,18.054 18.346,18.2 35.9,18.2 37.982,20.282 37.982,20.489 36.967,21.504 35.648,21.504 35.037,20.893 35.025,20.893 34.825,20.693 U2_8.1
AIN8: ADC.9 U2_9.1 | length 19
  Top Layer w0.25: ADC.9 14.231,7.446 14.361,7.576 14.41,7.576 14.85,8.016 14.85,12.595 17.55,15.295 17.55,20.787 16.833,21.504 15.648,21.504 15.037,20.893 15.025,20.893 14.825,20.693 U2_9.1
GND: *_1.4 *_2.4 *_3.4 *_4.4 *_5.4 *_6.4 *_7.4 *_8.4 *_9.4 ADC.18 D2.2 P1.1 P2.1 P3.1 pad.1@0,44 pad.1@188,0 pad.1@188,44 Q1_1.3 Q1_2.3 Q1_3.3 Q1_4.3 Q1_5.3 Q1_6.3 Q1_7.3 Q1_8.3 Q1_9.3 R1_1.1 R1_2.1 R1_3.1 R1_4.1 R1_5.1 R1_6.1 R1_7.1 R1_8.1 R1_9.1 U2_1.4 U2_2.4 U2_3.4 U2_4.4 U2_5.4 U2_6.4 U2_7.4 U2_8.4 U2_9.4 | length 35.2
  Top Layer w0.25: v1(2.953,7.639) 3.153,7.639 3.328,7.464 3.328,7.264 4.403,6.189 5.061,6.189 5.074,6.176 ADC.18 ; v1(16.791,31.156) 16.791,31.105 17.045,30.851 17.096,30.851 18.637,29.31 18.637,28.79 R1_9.1 ; v1@36.791,31.156 36.791,31.105 37.045,30.851 37.096,30.851 38.637,29.31 38.637,28.79 R1_8.1 ; v1@56.791,31.156 56.791,31.105 57.045,30.851 57.096,30.851 58.637,29.31 58.637,28.79 R1_7.1 ; v1(76.791,31.156) 76.791,31.105 77.045,30.851 77.096,30.851 78.637,29.31 78.637,28.79 R1_6.1 ; v1(96.791,31.156) 96.791,31.105 97.045,30.851 97.096,30.851 98.637,29.31 98.637,28.79 R1_5.1 ; v1(116.791,31.156) 116.791,31.105 117.045,30.851 117.096,30.851 118.637,29.31 118.637,28.79 R1_4.1 ; v1(136.791,31.156) 136.791,31.105 137.045,30.851 137.096,30.851 138.637,29.31 138.637,28.79 R1_3.1 ; v1(156.832,31.194) 156.832,31.143 157.086,30.889 157.137,30.889 158.678,29.348 158.678,28.828 R1_2.1 ; v1(176.791,31.156) 176.791,31.105 177.045,30.851 177.096,30.851 178.637,29.31 178.637,28.79 R1_1.1
  other v1: 30.1,21.7 70.1,21.8 10.1,21.9 90,21.9 130.1,21.9 32.1,22 50.1,22 92.1,22 110.1,22 132.1,22 150.1,22 170.1,22 12,22.1 52.1,22.1 72.1,22.1 112.1,22.1 152.2,22.1 172.1,22.1 16.725,22.688 36.725,22.688 56.725,22.688 76.725,22.688 96.725,22.688 116.725,22.688 136.725,22.688 176.725,22.688 156.766,22.726 30.1,23.3 70.1,23.4 90,23.4 130.1,23.4 10.1,23.5 50.1,23.5 110.1,23.5 150.1,23.5 170.1,23.5 36.8,31.2 56.8,31.2
Net*_1_3: *_1.3 R1_1.2 | length 3.2
  Top Layer w0.25: 176.791,24.856 176.791,24.907 177.045,25.161 177.096,25.161 178.587,26.652 178.587,27.122 R1_1.2
Net*_1_5: *_1.5 R2_1.2 | length 15
  Top Layer w0.25: R2_1.2 172.588,20.207 172.813,20.432 172.913,20.432 174.314,21.833 175.094,21.833 175.521,22.26 175.521,23.116 175.094,23.543 174.928,23.543 174.54,23.931 173.716,23.931 173.526,24.121 173.526,27.764 175.394,29.632 175.394,30.535 175.416,30.556 175.416,31.051 175.521,31.156
Net*_2_3: *_2.3 R1_2.2 | length 3.2
  Top Layer w0.25: 156.832,24.894 156.832,24.945 157.086,25.199 157.137,25.199 158.628,26.69 158.628,27.16 R1_2.2
Net*_2_5: *_2.5 R2_2.2 | length 15
  Top Layer w0.25: R2_2.2 152.629,20.245 152.854,20.47 152.954,20.47 154.355,21.871 155.135,21.871 155.562,22.298 155.562,23.154 155.135,23.581 154.969,23.581 154.581,23.969 153.757,23.969 153.567,24.159 153.567,27.802 155.435,29.67 155.435,30.573 155.457,30.594 155.457,31.089 155.562,31.194
Net*_3_3: *_3.3 R1_3.2 | length 3.2
  Top Layer w0.25: 136.791,24.856 136.791,24.907 137.045,25.161 137.096,25.161 138.587,26.652 138.587,27.122 R1_3.2
Net*_3_5: *_3.5 R2_3.2 | length 15.3
  Top Layer w0.25: R2_3.2 132.588,20.207 132.813,20.432 132.913,20.432 134.314,21.833 135.094,21.833 135.521,22.26 135.521,23.663 135.253,23.931 133.716,23.931 133.526,24.121 133.526,27.764 135.394,29.632 135.394,30.535 135.416,30.556 135.416,31.051 135.521,31.156
Net*_4_3: *_4.3 R1_4.2 | length 3.2
  Top Layer w0.25: 116.791,24.856 116.791,24.907 117.045,25.161 117.096,25.161 118.587,26.652 118.587,27.122 R1_4.2
Net*_4_5: *_4.5 R2_4.2 | length 15
  Top Layer w0.25: R2_4.2 112.588,20.207 112.813,20.432 112.913,20.432 114.314,21.833 115.094,21.833 115.521,22.26 115.521,23.116 114.706,23.931 113.716,23.931 113.526,24.121 113.526,27.764 115.394,29.632 115.394,30.535 115.416,30.556 115.416,31.051 115.521,31.156
Net*_5_3: *_5.3 R1_5.2 | length 3.2
  Top Layer w0.25: 96.791,24.856 96.791,24.907 97.045,25.161 97.096,25.161 98.587,26.652 98.587,27.122 R1_5.2
Net*_5_5: *_5.5 R2_5.2 | length 15.3
  Top Layer w0.25: R2_5.2 92.588,20.207 92.813,20.432 92.913,20.432 94.314,21.833 95.094,21.833 95.521,22.26 95.521,23.663 95.253,23.931 93.716,23.931 93.526,24.121 93.526,27.764 95.394,29.632 95.394,30.535 95.416,30.556 95.416,31.051 95.521,31.156
Net*_6_3: *_6.3 R1_6.2 | length 3.2
  Top Layer w0.25: 76.791,24.856 76.791,24.907 77.045,25.161 77.096,25.161 78.587,26.652 78.587,27.122 R1_6.2
Net*_6_5: *_6.5 R2_6.2 | length 15.3
  Top Layer w0.25: R2_6.2 72.588,20.207 72.813,20.432 72.913,20.432 74.314,21.833 75.094,21.833 75.521,22.26 75.521,23.663 75.253,23.931 73.716,23.931 73.526,24.121 73.526,27.764 75.394,29.632 75.394,30.535 75.416,30.556 75.416,31.051 75.521,31.156
Net*_7_3: *_7.3 R1_7.2 | length 3.2
  Top Layer w0.25: 56.791,24.856 56.791,24.907 57.045,25.161 57.096,25.161 58.587,26.652 58.587,27.122 R1_7.2
Net*_7_5: *_7.5 R2_7.2 | length 15
  Top Layer w0.25: R2_7.2 52.588,20.207 52.813,20.432 52.913,20.432 54.314,21.833 55.094,21.833 55.521,22.26 55.521,23.116 55.094,23.543 54.928,23.543 54.54,23.931 53.716,23.931 53.526,24.121 53.526,27.764 55.394,29.632 55.394,30.535 55.416,30.556 55.416,31.051 55.521,31.156
Net*_8_3: *_8.3 R1_8.2 | length 3.2
  Top Layer w0.25: 36.791,24.856 36.791,24.907 37.045,25.161 37.096,25.161 38.587,26.652 38.587,27.122 R1_8.2
Net*_8_5: *_8.5 R2_8.2 | length 15
  Top Layer w0.25: R2_8.2 32.588,20.207 32.813,20.432 32.913,20.432 34.314,21.833 35.094,21.833 35.521,22.26 35.521,23.116 35.094,23.543 34.928,23.543 34.54,23.931 33.716,23.931 33.526,24.121 33.526,27.764 35.394,29.632 35.394,30.535 35.416,30.556 35.416,31.051 35.521,31.156
Net*_9_3: *_9.3 R1_9.2 | length 3.2
  Top Layer w0.25: 16.791,24.856 16.791,24.907 17.045,25.161 17.096,25.161 18.587,26.652 18.587,27.122 R1_9.2
Net*_9_5: *_9.5 R2_9.2 | length 15
  Top Layer w0.25: R2_9.2 12.588,20.207 12.813,20.432 12.913,20.432 14.314,21.833 15.094,21.833 15.521,22.26 15.521,23.116 15.094,23.543 14.928,23.543 14.54,23.931 13.716,23.931 13.526,24.121 13.526,27.764 15.394,29.632 15.394,30.535 15.416,30.556 15.416,31.051 15.521,31.156
NetADC_17: ADC.17 D2.3 | length 4.2
  Top Layer w0.25: D2.3 5.153,8.589 5.328,8.414 5.328,8.214 6.731,6.811 ADC.17
NetADC_20: ADC.20 J1.4 | length 61.9
  Top Layer w0.25: ADC.20 8.401,4.776 9.104,4.776 11.573,2.307 11.573,0.281 11.719,0.135 46.158,0.135 47.641,1.618 47.641,8.462 47.006,9.097 46.134,9.097 44.666,10.565 39.1,10.565 J1.4
NetADC_21: ADC.21 J1.1 | length 56.7
  Top Layer w0.25: ADC.21 8.401,4.141 9.103,4.141 10.938,2.306 10.938,-0.048 11.39,-0.5 46.421,-0.5 48.091,1.17 48.091,8.91 47.455,9.546 47.193,9.546 47.192,9.547 46.32,9.547 45.58,10.287 J1.1
NetADC_22: ADC.22 J1.2 | length 62
  Top Layer w0.25: ADC.22 8.401,3.506 9.102,3.506 10.303,2.305 10.303,-0.05 11.388,-1.135 46.684,-1.135 48.541,0.722 48.541,9.358 47.13,10.769 47.13,12.765 46.49,13.405 44.67,13.405 44.22,12.955 43.816,12.955 43.166,12.305 J1.2
NetADC_23: ADC.23 J1.3 | length 66.9
  Top Layer w0.25: ADC.23 8.401,2.871 9.1,2.871 9.668,2.303 9.668,-0.051 11.387,-1.77 46.694,-1.77 48.991,0.527 48.991,9.806 47.58,11.217 47.58,13.588 47.312,13.855 44.484,13.855 44.479,13.85 44.225,13.85 43.78,13.405 42.384,13.405 41.284,12.305 J1.3
NetD1_1_1: D1_1.1 P1_1.1 Q1_1.2 | length 12
  Top Layer w2: D1_1.1 167.312,34.124 P1_1.1 Q1_1.2
NetD1_2_1: D1_2.1 P1_2.1 Q1_2.2 | length 12
  Top Layer w2: D1_2.1 147.353,34.162 P1_2.1 Q1_2.2
NetD1_3_1: D1_3.1 P1_3.1 Q1_3.2 | length 12
  Top Layer w2: D1_3.1 127.312,34.124 P1_3.1 Q1_3.2
NetD1_4_1: D1_4.1 P1_4.1 Q1_4.2 | length 12
  Top Layer w2: D1_4.1 107.312,34.124 P1_4.1 Q1_4.2
NetD1_5_1: D1_5.1 P1_5.1 Q1_5.2 | length 12
  Top Layer w2: D1_5.1 87.312,34.124 P1_5.1 Q1_5.2
NetD1_6_1: D1_6.1 P1_6.1 Q1_6.2 | length 12
  Top Layer w2: D1_6.1 67.312,34.124 P1_6.1 Q1_6.2
NetD1_7_1: D1_7.1 P1_7.1 Q1_7.2 | length 12
  Top Layer w2: D1_7.1 47.312,34.124 P1_7.1 Q1_7.2
NetD1_8_1: D1_8.1 P1_8.1 Q1_8.2 | length 12
  Top Layer w2: D1_8.1 27.312,34.124 P1_8.1 Q1_8.2
NetD1_9_1: D1_9.1 P1_9.1 Q1_9.2 | length 12
  Top Layer w2: D1_9.1 7.312,34.124 P1_9.1 Q1_9.2
NetD2_1: D2.1 R1.1 | length 2.3
  Top Layer w0.25: R1.1 1.386,8.196 1.611,8.421 1.611,8.521 2.454,9.364 2.778,9.364 D2.1
NetQ1_1_1: Q1_1.1 R2_1.1 U2_1.3 | length 13.8
  Top Layer w0.25: Q1_1.1 166.5,21 167.493,20.007 171.088,20.007 171.313,19.782 171.413,19.782 172.358,18.837 175.394,18.837 176.538,19.981 176.538,19.987 176.725,20.175 U2_1.3
NetQ1_2_1: Q1_2.1 R2_2.1 U2_2.3 | length 13.8
  Top Layer w0.25: Q1_2.1 146.541,21.038 147.534,20.045 151.129,20.045 151.354,19.82 151.454,19.82 152.399,18.875 155.435,18.875 156.579,20.019 156.579,20.025 156.766,20.213 U2_2.3
NetQ1_3_1: Q1_3.1 R2_3.1 U2_3.3 | length 13.8
  Top Layer w0.25: Q1_3.1 126.5,21 127.493,20.007 131.088,20.007 131.313,19.782 131.413,19.782 132.358,18.837 135.394,18.837 136.538,19.981 136.538,19.987 136.725,20.175 U2_3.3
NetQ1_4_1: Q1_4.1 R2_4.1 U2_4.3 | length 13.8
  Top Layer w0.25: Q1_4.1 106.5,21 107.493,20.007 111.088,20.007 111.313,19.782 111.413,19.782 112.358,18.837 115.394,18.837 116.538,19.981 116.538,19.987 116.725,20.175 U2_4.3
NetQ1_5_1: Q1_5.1 R2_5.1 U2_5.3 | length 13.8
  Top Layer w0.25: Q1_5.1 86.5,21 87.493,20.007 91.088,20.007 91.313,19.782 91.413,19.782 92.358,18.837 95.394,18.837 96.538,19.981 96.538,19.987 96.725,20.175 U2_5.3
NetQ1_6_1: Q1_6.1 R2_6.1 U2_6.3 | length 13.8
  Top Layer w0.25: Q1_6.1 66.5,21 67.493,20.007 71.088,20.007 71.313,19.782 71.413,19.782 72.358,18.837 75.394,18.837 76.538,19.981 76.538,19.987 76.725,20.175 U2_6.3
NetQ1_7_1: Q1_7.1 R2_7.1 U2_7.3 | length 13.8
  Top Layer w0.25: Q1_7.1 46.5,21 47.493,20.007 51.088,20.007 51.313,19.782 51.413,19.782 52.358,18.837 55.394,18.837 56.538,19.981 56.538,19.987 56.725,20.175 U2_7.3
NetQ1_8_1: Q1_8.1 R2_8.1 U2_8.3 | length 13.8
  Top Layer w0.25: Q1_8.1 26.5,21 27.493,20.007 31.088,20.007 31.313,19.782 31.413,19.782 32.358,18.837 35.394,18.837 36.538,19.981 36.538,19.987 36.725,20.175 U2_8.3
NetQ1_9_1: Q1_9.1 R2_9.1 U2_9.3 | length 13.8
  Top Layer w0.25: Q1_9.1 6.5,21 7.493,20.007 11.088,20.007 11.313,19.782 11.413,19.782 12.358,18.837 15.394,18.837 16.538,19.981 16.538,19.987 16.725,20.175 U2_9.3
SW5-0: *_1.1 J1.5 | length 156
  Top Layer w0.25: J1.5 34.62,13.62 35.3,14.3 44.292,14.3 44.298,14.305 174.105,14.305 178.2,18.4 178.2,20.907 177.675,21.432 177.675,23.081 177.119,23.638 175.636,23.638 175.281,23.993 175.114,23.993 174.726,24.381 174.526,24.381 174.251,24.656 174.251,24.856
SW5-1: *_2.1 J1.6 | length 147.9
  Top Layer w0.25: J1.6 32,12.185 32,6.955 v1(32.049,6.907) ; 154.292,24.894 154.292,24.694 154.567,24.419 154.767,24.419 155.155,24.031 155.322,24.031 155.677,23.676 157.16,23.676 157.716,23.119 157.716,21.646 157.862,21.5 158.954,21.5 159.1,21.354 159.1,19.3 v1(155.6,15.8)
  Bottom Layer w0.25: v1(32.049,6.907) 32,6.955 32,7.165 32.3,7.465 45.038,7.465 46.21,8.637 46.21,9.653 47.58,11.023 47.58,11.18 47.8,11.4 48,11.4 50,13.4 133.3,13.4 133.35,13.45 134.498,13.45 136.848,15.8 v1(155.6,15.8)
SW5-2: *_3.1 J1.7 | length 130
  Top Layer w0.25: J1.7 29.3,12.145 v1(29.3,6.94) ; 134.251,24.856 135.044,24.856 136.262,23.638 137.118,23.638 139.6,21.156 139.6,19.9 136.01,16.31 v1(136,16.31)
  Bottom Layer w0.25: v1(29.3,6.94) 30.275,7.915 44.852,7.915 45.76,8.823 45.76,9.839 47.13,11.209 47.13,11.43 49.6,13.9 133.59,13.9 v1(136,16.31)
SW12-0: *_4.1 J1.8 | length 109.5
  Top Layer w0.25: 114.251,24.856 114.251,24.656 114.526,24.381 114.893,24.381 115.617,23.656 117.1,23.656 117.825,22.932 117.825,19.827 116.6,18.602 v1(116.6,16.76)
  Bottom Layer w0.25: J1.8 26.4,12.109 25.8,11.509 25.8,9.88 27.314,8.365 44.666,8.365 45.31,9.01 45.31,10.026 46.68,11.396 46.68,11.616 49.464,14.4 114.24,14.4 v1(116.6,16.76)
SW12-1: *_5.1 J1.9 | length 71.5
  Top Layer w0.25: 94.251,24.856 95.566,24.856 96.491,23.931 96.869,23.931 98.3,22.5 98.3,18.5 v1(97.11,17.31)
  Bottom Layer w0.25: J1.9 44.21,12.945 ; v1(97.11,17.31) 95.682,15.882 49.082,15.882 46.605,13.405 ; 44.21,12.945 44.67,13.405 ; 44.21,12.945 44.67,13.405 ; 44.67,13.405 46.605,13.405 ; 44.67,13.405 46.605,13.405
SW12-2: *_6.1 J1.10 | length 88.4
  Top Layer w0.25: 74.251,24.856 75.566,24.856 76.491,23.931 76.825,23.931 77.675,23.081 77.675,22.825 78.9,21.6 78.9,19.4 77.26,17.76 v1(77.218,17.76)
  Bottom Layer w0.25: 41.47,12.491 J1.10 41.47,12.491 ; 41.47,12.491 42.384,13.405 ; 41.47,12.491 42.384,13.405 ; 42.384,13.405 42.505,13.405 45.432,16.332 ; 45.432,16.332 75.79,16.332 ; 45.432,16.332 75.79,16.332 ; 75.79,16.332 v1(77.218,17.76) 75.79,16.332
SW24-0: *_7.1 J1.11 | length 54.8
  Top Layer w0.25: 54.251,24.856 54.251,24.656 54.526,24.381 54.726,24.381 55.114,23.993 55.281,23.993 55.636,23.638 57.119,23.638 57.675,23.081 57.675,21.432 58.3,20.807 v1(58.3,18.21)
  Bottom Layer w0.25: J1.11 38.73,11.483 39,11.753 39,12.761 39.644,13.405 39.905,13.405 ; 39.905,13.405 44.71,18.21 ; 39.905,13.405 44.71,18.21 ; 44.71,18.21 v1(58.3,18.21) 44.71,18.21
SW24-1: *_8.1 J1.12 | length 19.8
  Top Layer w0.25: 34.251,24.856 34.251,24.656 34.526,24.381 34.726,24.381 35.114,23.993 35.281,23.993 35.636,23.638 37.118,23.638 37.675,23.081 37.675,21.432 39.1,20.007 v1(39.1,18.76)
  Bottom Layer w0.25: J1.12 37.394,10.87 37.48,10.87 38.28,11.67 38.46,11.85 38.46,14.847 39,15.387 39,18.66 v1(39.1,18.76)
SW24-2: *_9.1 J1.13 | length 37.9
  Top Layer w0.25: 14.251,24.856 14.251,24.656 14.526,24.381 14.726,24.381 15.114,23.993 15.281,23.993 15.636,23.638 17.118,23.638 17.675,23.081 17.675,21.432 19.752,19.355 v1(20.262,19.355) ; v1(22.8,6.8) 28.082,6.8 28.902,5.98 29.698,5.98 30.518,6.8 30.798,6.8 31.651,5.947 32.446,5.947 33.009,6.509 33.009,7.398 32.54,7.867 32.54,8.756 J1.13
  Bottom Layer w0.25: v1(20.262,19.355) 20.457,19.16 21.9,17.717 21.9,7.7 v1(22.8,6.8)
pads on no net: *_1.2 *_2.2 *_3.2 *_4.2 *_5.2 *_6.2 *_7.2 *_8.2 *_9.2 ADC.10 ADC.11 ADC.12 ADC.13 ADC.14 ADC.15 ADC.16 ADC.24 J1.14 J1.15 J1.MH1 J1.MH2 U2_1.2 U2_2.2 U2_3.2 U2_4.2 U2_5.2 U2_6.2 U2_7.2 U2_8.2 U2_9.2

## Polygon pours and split planes (outlines as drawn)
GND on Bottom Layer "Ground Plane" (solid, remove dead copper, pour order 3): -5,-5 193,-5 193,49 -5,49

## Keep-outs
Keep-Out Layer:
  the board outline again, w0.1

## Silkscreen, mask and mechanical layers (free items; w line width, h text height)
Top Overlay:
  drawing of 30 lines, arcs and shapes, not listed
  text "24V" at 1.495,13.7 h5
  text "5V" at 144.8,13.556 h5
  text "12V" at 88,12.7 h5
  text "| 1    | 2    | 3    | 4  | / | SCLK | MOSI | MISO | SS |" at 127.7,8 h1.52
  text "'.ModifiedDate' | Rev. 0.1" at 108.9,3.678 h2
  text "4505-WB-AV-SWITCHING" at 108.7,1.224 h2
  text "| 5   | 6   | 7   | 8   | 9   | 10  | 11  | 12  | 13  | / | CH1 | CH2 | CH3 | CH4 | CH5 | CH6 | CH7 | CH8 | CH9 |" at 90.9,-4.5 h1.52